# Altium PCB Copy of Main_board_2.PcbDoc (part 2 of 2)
Units mm, origin at the board's own origin, x right, y up, seen from the top; angles counter-clockwise.
Board outline 130 x 70 mm, 4 copper layers (Top Layer, Int1 (GND), Int2 (PWR), Bottom Layer), stack 1.577 mm thick; 69 components, 62 nets, 244 pads, 36 vias.
Unrouted connection lines stored in the file: 8.
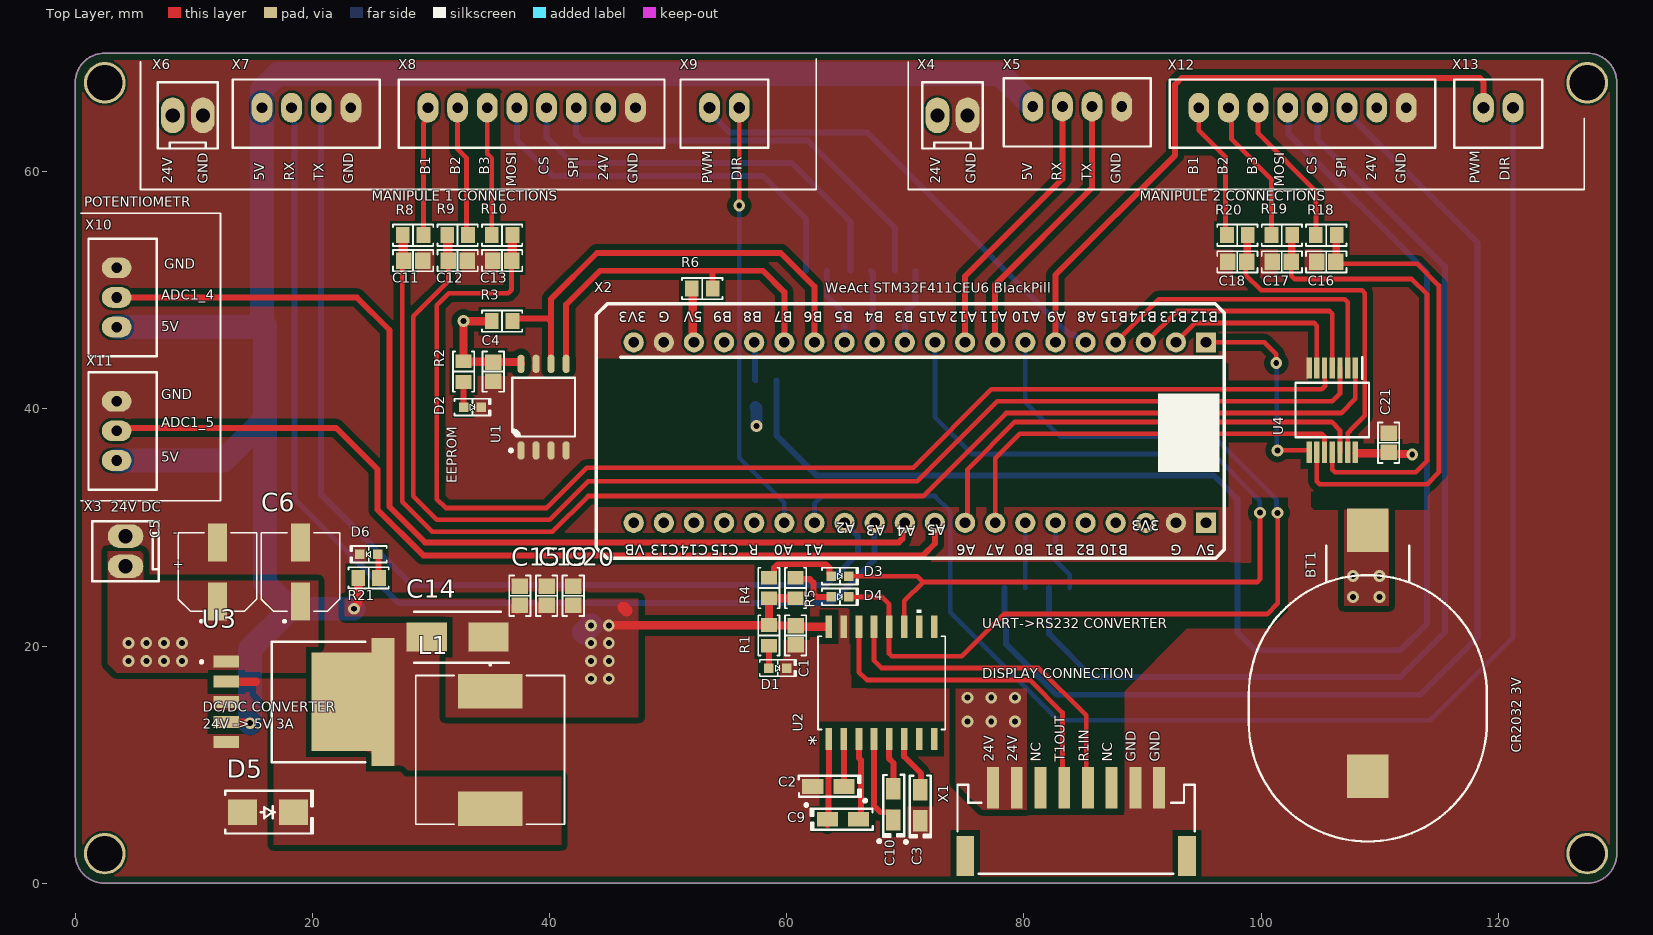
[diagram p0: Top Layer view]

## Silkscreen, mask and mechanical layers (free items; w line width, h text height) (continued)
Top Overlay: (continued)
  text "RX" at 18.75,59.25 h1.4 r90
  text "TX" at 21.25,59.25 h1.4 r90
  text "24V" at 45.25,59.25 h1.4 r90
  text "DIR" at 56.5,59.25 h1.4 r90
  text "5V" at 80.983,59.25 h1.4 r90
  text "RX" at 83.5,59.25 h1.4 r90
  text "TX" at 86,59.25 h1.4 r90
  text "24V" at 110,59.25 h1.4 r90
  text "DIR" at 121.25,59.25 h1.4 r90
  text "24V" at 8.5,59 h1.4 r90
  text "GND" at 11.483,59 h1.4 r90
  text "GND" at 23.733,59 h1.4 r90
  text "GND" at 47.733,59 h1.4 r90
  text "PWM" at 54,59 h1.4 r90
  text "24V" at 73.25,59 h1.4 r90
  text "GND" at 76.233,59 h1.4 r90
  text "GND" at 88.483,59 h1.4 r90
  text "GND" at 112.483,59 h1.4 r90
  text "PWM" at 118.75,59 h1.4 r90
  text "MOSI" at 37.483,58.75 h1.4 r90
  text "MOSI" at 102.233,58.75 h1.4 r90
  text "MANIPULE 1 CONNECTIONS" at 25,57.267 h1.4
  text "MANIPULE 2 CONNECTIONS" at 89.75,57.267 h1.4
  text "POTENTIOMETR" at 0.75,56.767 h1.4
  text "GND" at 7.5,51.517 h1.4
  text "WeAct STM32F411CEU6 BlackPill" at 63.25,49.517 h1.4
  text "ADC1_4" at 7.25,48.918 h1.4
  text "5V" at 7.25,46.267 h1.4
  text "GND" at 7.25,40.517 h1.4
  text "ADC1_5" at 7.25,38.168 h1.4
  text "5V" at 7.25,35.267 h1.4
  text "EEPROM" at 32.483,33.75 h1.4 r90
  text "24V DC" at 3,31.016 h1.4
  text "-" at 8.25,28.935 h1.4
  text "+" at 8.25,26.234 h1.4
  text "UART->RS232 CONVERTER /  /  / DISPLAY CONNECTION" at 76.5,17 h1.4
  text "DC/DC CONVERTER / 24V -> 5V 3A" at 10.75,12.75 h1.4
  text "CR2032 3V" at 122.233,11 h1.4 r90
  text "24V" at 77.75,10.25 h1.4 r90
  text "24V" at 79.75,10.25 h1.4 r90
  text "NC" at 81.734,10.25 h1.4 r90
  text "T1OUT" at 83.733,10.25 h1.4 r90
  text "R1IN" at 85.75,10.25 h1.4 r90
  text "NC" at 87.734,10.25 h1.4 r90
  text "GND" at 89.733,10.25 h1.4 r90
  text "GND" at 91.733,10.25 h1.4 r90

## Dimensions
0,0 to 0,70 on Mechanical 15
0,0 to 130,0 on Mechanical 15

## Text inside footprints (layer, text, board x,y; h text height)
U2: Top Overlay "*" at 63.124,11.594 h1.27 r90; Mechanical 13 "*" at 64.101,13.166 h1.27 r90
X2: Top Overlay "B13" at 93.811,48.485 h1.52 r180; Top Overlay "5V" at 96.147,28.851 h1.52 r180; Top Overlay "B10" at 88.781,28.851 h1.52 r180; Top Overlay "C14" at 53.399,28.851 h1.52 r180; Top Overlay "B7" at 60.503,48.485 h1.52 r180; Top Overlay "A8" at 86.089,48.485 h1.52 r180; Top Overlay "B15" at 88.781,48.485 h1.52 r180; Top Overlay "A10" at 81.39,48.485 h1.52 r180; Top Overlay "A12" at 76.081,48.485 h1.52 r180; Top Overlay "A2" at 65.769,30.679 h1.52 r180; Top Overlay "VB" at 48.04,28.851 h1.52 r180; Top Overlay "A1" at 63.102,28.851 h1.52 r180; Top Overlay "B1" at 83.422,28.851 h1.52 r180; Top Overlay "A5" at 73.414,30.527 h1.52 r180; Top Overlay "3V3" at 48.192,48.485 h1.52 r180; Top Overlay "A0" at 60.554,28.851 h1.52 r180; Top Overlay "B4" at 68.199,48.485 h1.52 r180; Top Overlay "5V" at 52.941,48.51 h1.52 r180; Top Overlay "C13" at 50.885,28.851 h1.52 r180; Top Overlay "B8" at 57.954,48.485 h1.52 r180; Top Overlay "B3" at 70.697,48.485 h1.52 r180; Top Overlay "A3" at 68.309,30.476 h1.52 r180; Top Overlay "B9" at 55.406,48.485 h1.52 r180; Top Overlay "G" at 93.303,28.851 h1.52 r180; Top Overlay "3V3" at 91.474,30.908 h1.52 r180; Top Overlay "B2" at 86.013,28.851 h1.52 r180; Top Overlay "A9" at 83.574,48.485 h1.52 r180; Top Overlay "A11" at 78.647,48.485 h1.52 r180; Top Overlay "A7" at 78.367,28.851 h1.52 r180; Top Overlay "A6" at 75.929,28.851 h1.52 r180; Top Overlay "B12" at 96.376,48.485 h1.52 r180; Top Overlay "G" at 50.123,48.485 h1.52 r180; Top Overlay "A15" at 73.516,48.485 h1.52 r180; Top Overlay "B6" at 63.051,48.485 h1.52 r180; Top Overlay "A4" at 70.874,30.425 h1.52 r180; Top Overlay "R" at 57.624,28.851 h1.52 r180; Top Overlay "C15" at 55.965,28.851 h1.52 r180; Top Overlay "B5" at 65.6,48.485 h1.52 r180; Top Overlay "B14" at 91.245,48.485 h1.52 r180; Top Overlay "B0" at 80.831,28.851 h1.52 r180